# Altium PCB Updated_PCB.PcbDoc
Units mil, origin at the board's own origin, x right, y up, seen from the top; angles counter-clockwise.
Board outline 3930 x 3330 mil, 2 copper layers (Top Layer, Bottom Layer); 14 components, 29 nets, 94 pads, 0 vias.
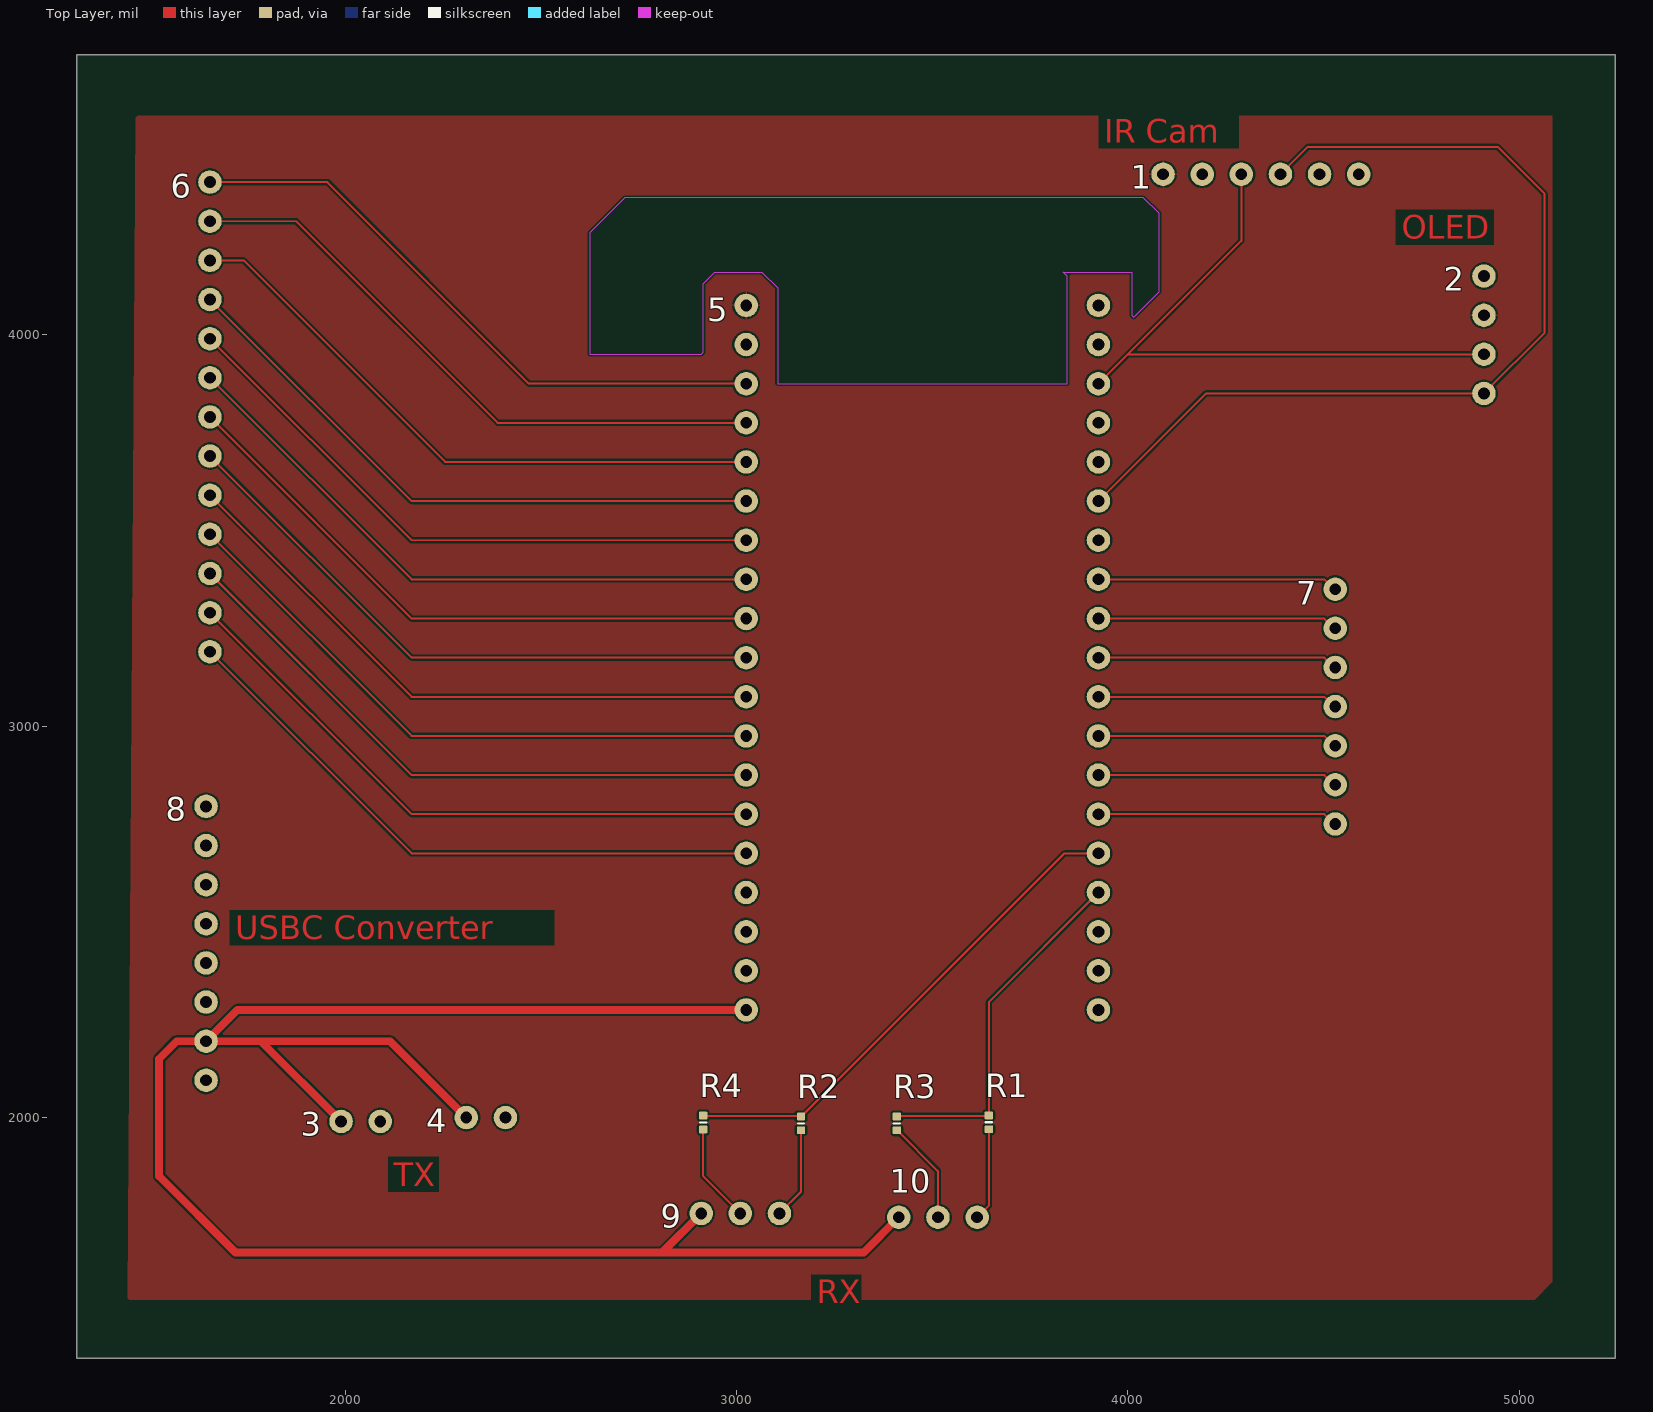
[diagram p0: Top Layer view]
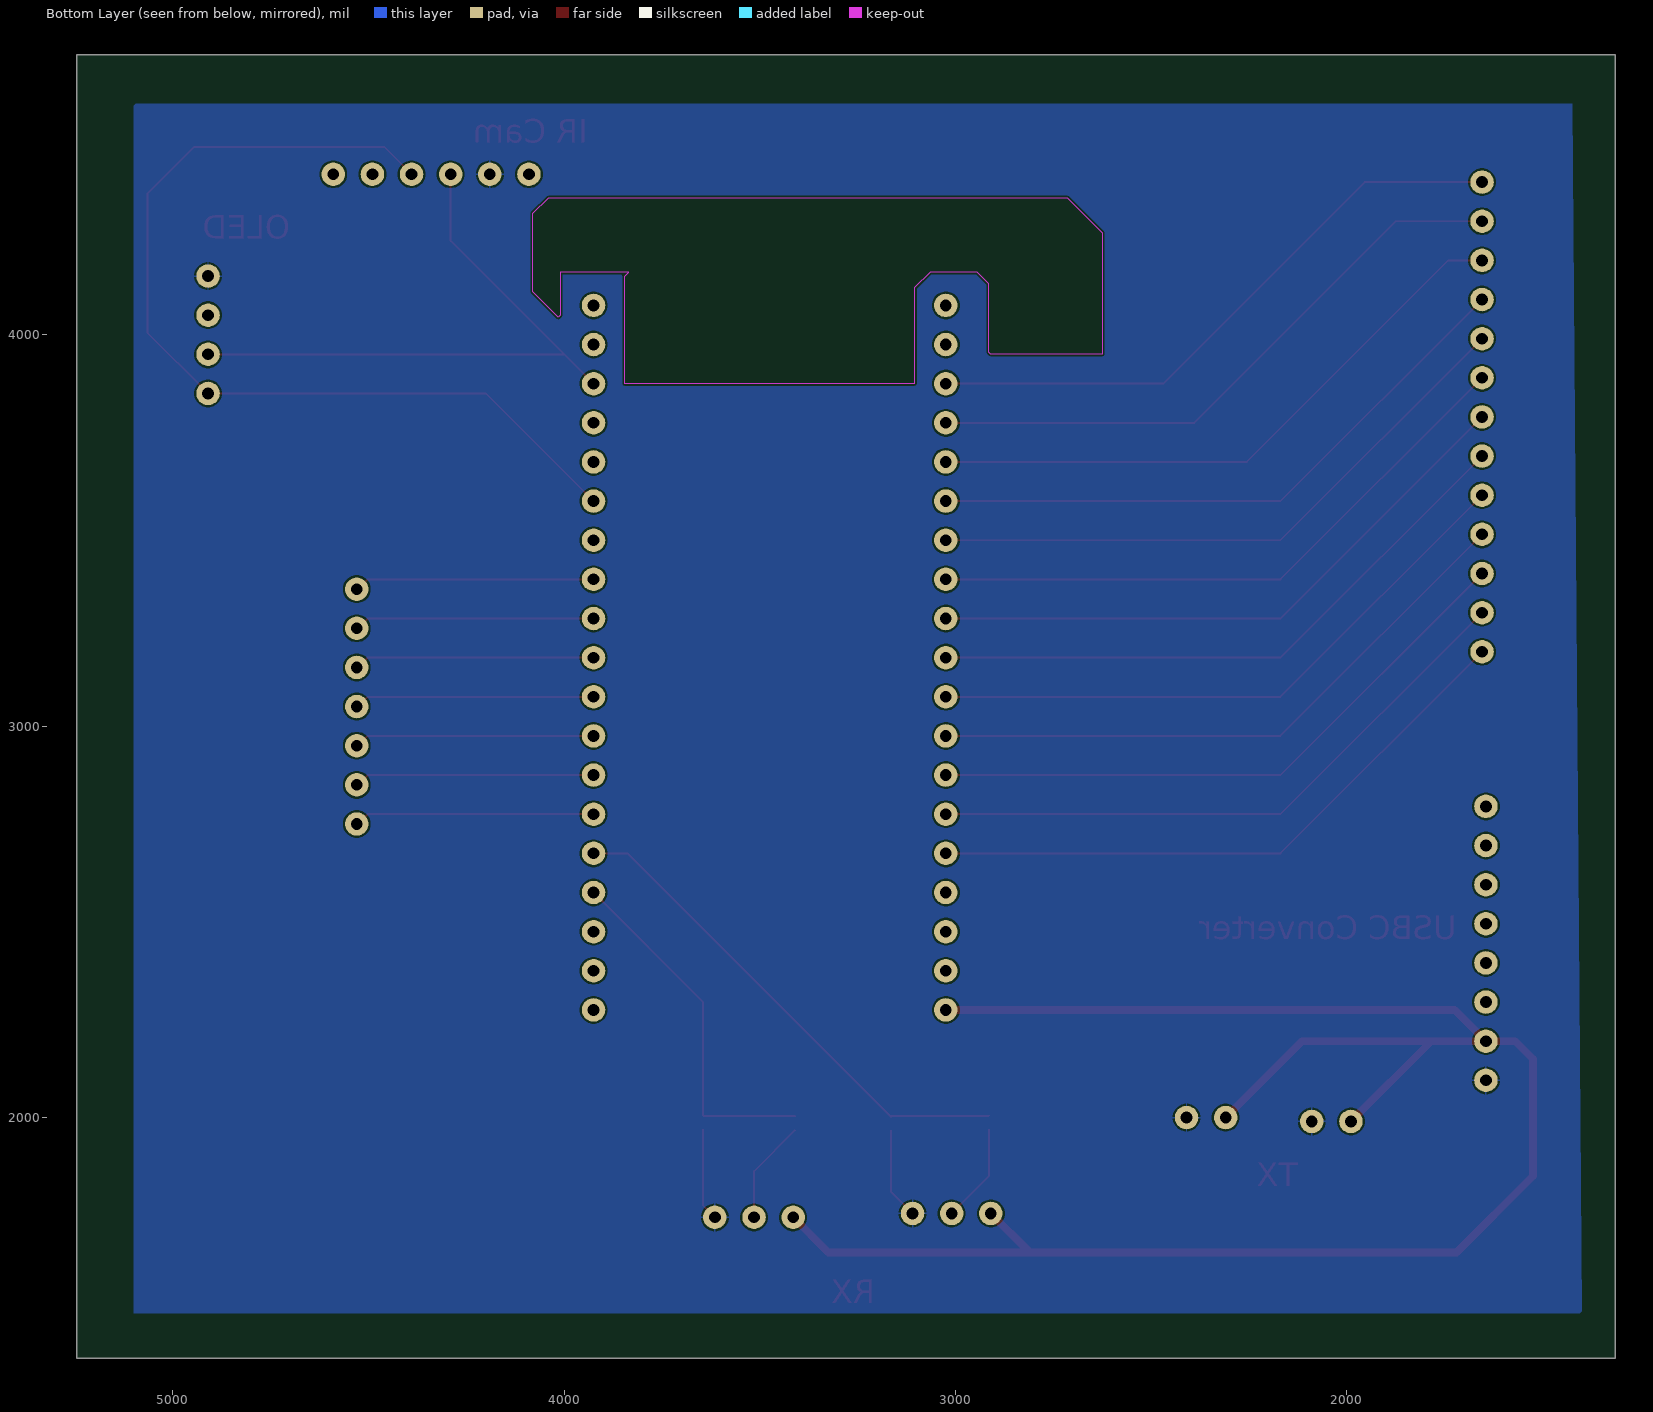
[diagram p1: Bottom Layer view, seen from below]

## Layer stack, top to bottom
Top Solder: solder mask 0.4, Solder Resist, Dk 3.5
Top Layer: signal copper 1.4
Dielectric 1: dielectric 12.6, FR-4, Dk 4.8
Bottom Layer: signal copper 1.4
Bottom Solder: solder mask 0.4, Solder Resist, Dk 3.5

## Board outline
1315,1385 1315,4715 5245,4715 5245,1385

## Design rules (kind name [scope] priority, off if disabled: settings)
BoardOutlineClearance [All] p1: gap=7.87 ignorepadtopadclearanceinfootprint=FALSE
Clearance [All] p1: gap=5 ignorepadtopadclearanceinfootprint=FALSE except(9.84: Arc-Hole Track-Hole SMDPad-Hole THPad-Hole Via-Hole Fill-Hole Poly-Hole Region-Hole Text-Hole)
ComponentClearance [All] p1: gap=5 collisioncheckmode=3 verticalgap=5 showdistances=TRUE
DiffPairsRouting [All] p1: maxlimit=10 minlimit=5 mostfreqgap=5 toplayer_minwidth=5 toplayer_maxwidth=1000 toplayer_prefwidth=5 bottomlayer_minwidth=5 bottomlayer_maxwidth=1000 bottomlayer_prefwidth=5 maxuncoupledlength=500
Height [All] p1: minheight=0 maxheight=71497.94 prefheight=500
HoleSize [All] p1: absolutevalues=TRUE maxlimit=248.03 minlimit=11.81 maxpercent=80.000 minpercent=20.000
HoleToHoleClearance [All] p1: gap=9.84 allowstackedmicrovias=FALSE
MinimumAnnularRing [All] p1: minimumring=3
MinimumSolderMaskSliver [All] p1: minsoldermaskwidth=0
PlaneClearance [All] p1: clearance=5
PlaneConnect PlaneConnectPowerPads [InPadClass('PowerPads')] p1: planeconnectstyle=Direct reliefexpansion=20 reliefentries=4 reliefconductorwidth=10 reliefairgap=10
PlaneConnect [All] p2: pad.planeconnectstyle=Relief pad.reliefexpansion=11.81 pad.reliefentries=4 pad.reliefconductorwidth=5 pad.reliefairgap=5 via.planeconnectstyle=Direct via.reliefexpansion=11.81 via.reliefentries=4 via.reliefconductorwidth=5 via.reliefairgap=5
PolygonConnect PolygonConnectPowerPads [All vs (InPadClass('PowerPads'))] p1: connectstyle=Direct reliefconductorwidth=10 reliefentries=4 polygonreliefangle="90 Angle" airgapwidth=10
PolygonConnect [All] p2: thpad.connectstyle=Relief thpad.reliefconductorwidth=5 thpad.reliefentries=4 thpad.polygonreliefangle="90 Angle" thpad.airgapwidth=5 smdpad.connectstyle=Relief smdpad.reliefconductorwidth=5 smdpad.reliefentries=4 smdpad.polygonreliefangle="90 Angle" smdpad.airgapwidth=5 via.connectstyle=Direct via.reliefconductorwidth=5 via.reliefentries=4 via.polygonreliefangle="90 Angle" via.airgapwidth=5
RoutingVias [All] p1: holewidth=11.81 width=23.62 viastyle="Through Hole" minholewidth=11.81 minwidth=23.62 maxholewidth=23.62 maxwidth=259.84
SilkToSilkClearance [All] p1: silktosilkclearance=0
SilkToSolderMaskClearance [IsPad] p1: minsilkscreentomaskgap=5 clearancetoexposedcopper=TRUE
SolderMaskExpansion [All] p1: expansion=2.95 istentingtop=FALSE
SupplyNets "Schematic Supply Nets_2" [InNet('3.3V')] p1: voltage=0.000
SupplyNets "Schematic Supply Nets_1" [InNet('GND')] p2: voltage=0.000
SupplyNets "Schematic Supply Nets" [InNet('5V')] p3: voltage=0.000
Width [All] p1: maxlimit=1000 minlimit=5 preferedwidth=5 minimp=50.000000 maximp=50.000000 favimp=50.000000
20 further rules are at their usual default settings.

## Components (designator, comment, footprint, x,y, rotation, side; value= is the part's Value field where it differs from the comment)
1 "Eye Grid Camera" "IR Camera" 4090,4410 r90 top
2 "OLED" OLED 4910,4150 r0 top
3 "BeamSensor_TX" Beam_TX 1990,1990 r90 top
4 "BeamSensor_TX" Beam_TX 2310,2000 r90 top
5 "ESP32" ESP32 3925,3975 r0 top
6 "Breakout_Left" "Left Breakout" 1655,4390 r0 top
7 "Breakout_Right" Breakout_Right 4530,2750 r0 top
8 "USBC Converter" "USBC converter" 1645,2795 r0 top
9 "BeamSensor_RX" Beam_RX 2910,1755 r90 top
10 "BeamSensor_RX" Beam_RX 3415,1745 r90 top
R1 "4D7KR2F" RESC0402(1005)_L 3645,1987.72 r270 top value=4.7k
R2 "4D7KR2F" RESC0402(1005)_L 3165,1985 r270 top value=4.7k
R3 "3KR2F" RESC0402(1005)_L 3410,1985 r90 top value=3k
R4 "3KR2F" RESC0402(1005)_L 2915,1987.28 r90 top value=3k

## Footprints (in the part's own frame and the unit in brackets; to place one, negate y for a bottom-side part, rotate by r counter-clockwise, add the part's x,y. Pads: shape width x height; smd on the part's side, far side on the other; paste and mask are expansions set on the pad)
Beam_RX [mil]
  round 60 hole 30: 0(0,0) 1(0,-100) 2(0,-200)
Beam_TX [mil]
  round 60 hole 30: 0(0,0) 1(0,-100)
Breakout_Right [mil]
  round 60 hole 30: 25(0,0) 26(0,100) 27(0,200) 28(0,300) 29(0,400) 30(0,500) 31(0,600)
ESP32 [mil] "initial footprint design for the ESP32"
  round 60 hole 30: 1(-900,100) 2(-900,0) 3(-900,-100) 4(-900,-200) 5(-900,-300) 6(-900,-400) 7(-900,-500) 8(-900,-600) 9(-900,-700) 10(-900,-800) 11(-900,-900) 12(-900,-1000) 13(-900,-1100) 14(-900,-1200) 15(-900,-1300) 16(-900,-1400) 17(-900,-1500) 18(-900,-1600) 19(-900,-1700) 20(0,-1700) 21(0,-1600) 22(0,-1500) 23(0,-1400) 24(0,-1300) 25(0,-1200) 26(0,-1100) 27(0,-1000) 28(0,-900) 29(0,-800) 30(0,-700) 31(0,-600) 32(0,-500) 33(0,-400) 34(0,-300) 35(0,-200) 36(0,-100) 37(0,0) 38(0,100)
"IR Camera" [mil]
  round 60 hole 30: 1(0,0) 2(0,-100) 3(0,-200) 4(0,-300) 5(0,-400) 6(0,-500)
"Left Breakout" [mil] "left breakout bar for wiring"
  round 60 hole 30: 3(0,0) 4(0,-100) 5(0,-200) 6(0,-300) 7(0,-400) 8(0,-500) 9(0,-600) 10(0,-700) 11(0,-800) 12(0,-900) 13(0,-1000) 14(0,-1100) 15(0,-1200)
OLED [mil]
  round 60 hole 30: 0(0,0) 1(0,-100) 2(0,-200) 3(0,-300)
RESC0402(1005)_L [mm] "Chip Resistor, Body 1.0x0.5mm, IPC High Density"
  rrect25% 0.5x0.55 smd: 1(-0.45,0) 2(0.45,0)
  silkscreen extent 0,-0.2 0,0.2, body extent -0.5,-0.25 0.5,0.25, height 0.3
"USBC converter" [mil]
  round 60 hole 30: 1(0,0) 2(0,-100) 3(0,-200) 4(0,-300) 5(0,-400) 6(0,-500) 7(0,-600) 8(0,-700)

## Part data
1: library part CMP-00006-1, "IR Camera"
2: library part CMP-00005-1, "footprint of OLED display"
3 4: library part CMP-00003-3, "pinout for the break beam sensor"
5: library part CMP-00000-1, "first esp32 footprint"
6: library part CMP-00001-1, "left breakout rail"
7: library part CMP-00002-1, "right breakout rail"
8: library part CMP-00007-1, "Converter for the power bank"
9 10: library part CMP-00004-1, "pinout for the break beam sensor RX"
R1 R2: library part CMP-009-00105-2, "4K7 0.063W 1% 0402 (1005 Metric)  SMD", Case/Package=0402, Power=63mW, Tolerance=1%, Component Type=Resistors, Mounting Technology=SMT, Pins=2
R3 R4: library part CMP-009-00099-2, "3K 0.063W 1% 0402 (1005 Metric)  SMD", Case/Package=0402, Power=63mW, Tolerance=1%, Component Type=Resistors, Mounting Technology=SMT, Pins=2

## Nets (pads, with @x,y where several pads share a name; then routed paths per layer and width w, separated by ;. In a path a pad name is that pad's centre, name@x,y a point inside that pad or via, vN(x,y) a via of type N, cw(c..) or ccw(c..) an arc to the next point about the centre after c; other vN are vias at no path point)
3.3V: 1.1 2.1 5.1
5V: 3.0 4.0 5.19 8.7 9.0 10.0 | length 5036.9
  Top Layer w20: 3.0 1785,2195 ; 4.0 2115,2195 1785,2195 ; 9.0 2810,1655 ; 5.19 1725,2275 8.7 ; 10.0 3325,1655 2810,1655 ; 8.7 1785,2195 ; 8.7 1570,2195 1525,2150 1525,1850 1720,1655 2810,1655
GND: 1.2 2.0 3.1 4.1 8.8 9.2 10.2 R1.2 R2.2 | length 472.5
  Top Layer w5: 9.2 3165,1810 R2.2 ; 10.2 3645,1775 R1.2
Net1_3: 1.3 2.2 5.36 | length 1596.2
  Top Layer w5: 5.36 4000,3950 ; 1.3 4290,4240 4000,3950 ; 2.2 4000,3950
Net1_4: 1.4 2.3 5.33 | length 2426.8
  Top Layer w5: 5.33 4200,3850 2.3 5065,4005 5065,4360 4945,4480 4460,4480 1.4
Net5_3: 5.3 6.3 | length 1583.3
  Top Layer w5: 6.3 1955,4390 2470,3875 5.3
Net5_4: 5.4 6.4 | length 1583.3
  Top Layer w5: 6.4 1875,4290 2390,3775 5.4
Net5_5: 5.5 6.5 | length 1583.3
  Top Layer w5: 6.5 1740.86,4190 2255.86,3675 5.5
Net5_6: 5.6 6.6 | length 1583.3
  Top Layer w5: 6.6 2170,3575 5.6
Net5_7: 5.7 6.7 | length 1583.3
  Top Layer w5: 6.7 2170,3475 5.7
Net5_8: 5.8 6.8 | length 1583.3
  Top Layer w5: 6.8 2170,3375 5.8
Net5_9: 5.9 6.9 | length 1583.3
  Top Layer w5: 6.9 2170,3275 5.9
Net5_10: 5.10 6.10 | length 1583.3
  Top Layer w5: 6.10 2170,3175 5.10
Net5_11: 5.11 6.11 | length 1583.3
  Top Layer w5: 6.11 2170,3075 5.11
Net5_12: 5.12 6.12 | length 1583.3
  Top Layer w5: 6.12 2170,2975 5.12
Net5_13: 5.13 6.13 | length 1583.3
  Top Layer w5: 6.13 2170,2875 5.13
Net5_14: 5.14 6.14 | length 1583.3
  Top Layer w5: 6.14 2170,2775 5.14
Net5_15: 5.15 6.15 | length 1583.3
  Top Layer w5: 6.15 2170,2675 5.15
Net5_23: 5.23 R1.1 R3.2 | length 921.7
  Top Layer w5: R3.2 3411.36,2004.07 3643.64,2004.07 R1.1 3645,2295 5.23
Net5_24: 5.24 R2.1 R4.2 | length 1289.4
  Top Layer w5: R4.2 2916.14,2003.86 3163.86,2003.86 R2.1 3165.98,2002.72 3838.27,2675 5.24
Net5_25: 5.25 7.25 | length 615.4
  Top Layer w5: 5.25 4501.97,2775 4526.97,2750 7.25
Net5_26: 5.26 7.26 | length 615.4
  Top Layer w5: 5.26 4501.97,2875 4526.97,2850 7.26
Net5_27: 5.27 7.27 | length 615.4
  Top Layer w5: 5.27 4501.97,2975 4526.97,2950 7.27
Net5_28: 5.28 7.28 | length 615.4
  Top Layer w5: 5.28 4501.97,3075 4526.97,3050 7.28
Net5_29: 5.29 7.29 | length 615.4
  Top Layer w5: 5.29 4501.97,3175 4526.97,3150 7.29
Net5_30: 5.30 7.30 | length 615.4
  Top Layer w5: 5.30 4501.97,3275 4526.97,3250 7.30
Net5_31: 5.31 7.31 | length 615.4
  Top Layer w5: 5.31 4501.97,3375 4526.97,3350 7.31
Net9_1: 9.1 R4.1 | length 253.9
  Top Layer w5: R4.1 2915,1850 9.1
Net10_1: 10.1 R3.1 | length 266.4
  Top Layer w5: R3.1 3410.98,1967.28 3515,1863.27 10.1
pads on no net: 1.5 1.6 5.2 5.16 5.17 5.18 5.20 5.21 5.22 5.32 5.34 5.35 5.37 5.38 8.1 8.2 8.3 8.4 8.5 8.6

## Polygon pours and split planes (outlines as drawn)
GND on Bottom Layer "GND_L02_P000" (solid, pour order 0): 1425,4590 5095,4590 5100,4585 5100,1500 1405,1500 1400,1505
3.3V on Top Layer "3.3V_L01_P001" (solid, pour order 1): 1465,4555 1470,4560 5085,4560 5085,1580 5040,1535 1445,1535

## Keep-outs
Keep-Out Layer:
  region: 3105,3875 3845,3875 3845,4150 3835,4160 4010,4160 4010,4050 4015,4045 4080,4110 4080,4310 4040,4350 2715,4350 2625,4260 2625,3950 2910,3950 2915,3955 2915,4130 2945,4160 3065,4160 3105,4120 3105,3880

## Other copper
Top Layer:
  text "IR Cam" at 3940,4490 h60
  text "OLED" at 4700,4245 h60
  text "USBC Converter" at 1720,2455 h60
  text "TX" at 2125,1825 h60
  text "RX" at 3205,1525 h60